# EAGLE board brain2_v10 (EAGLE 9.6.2)
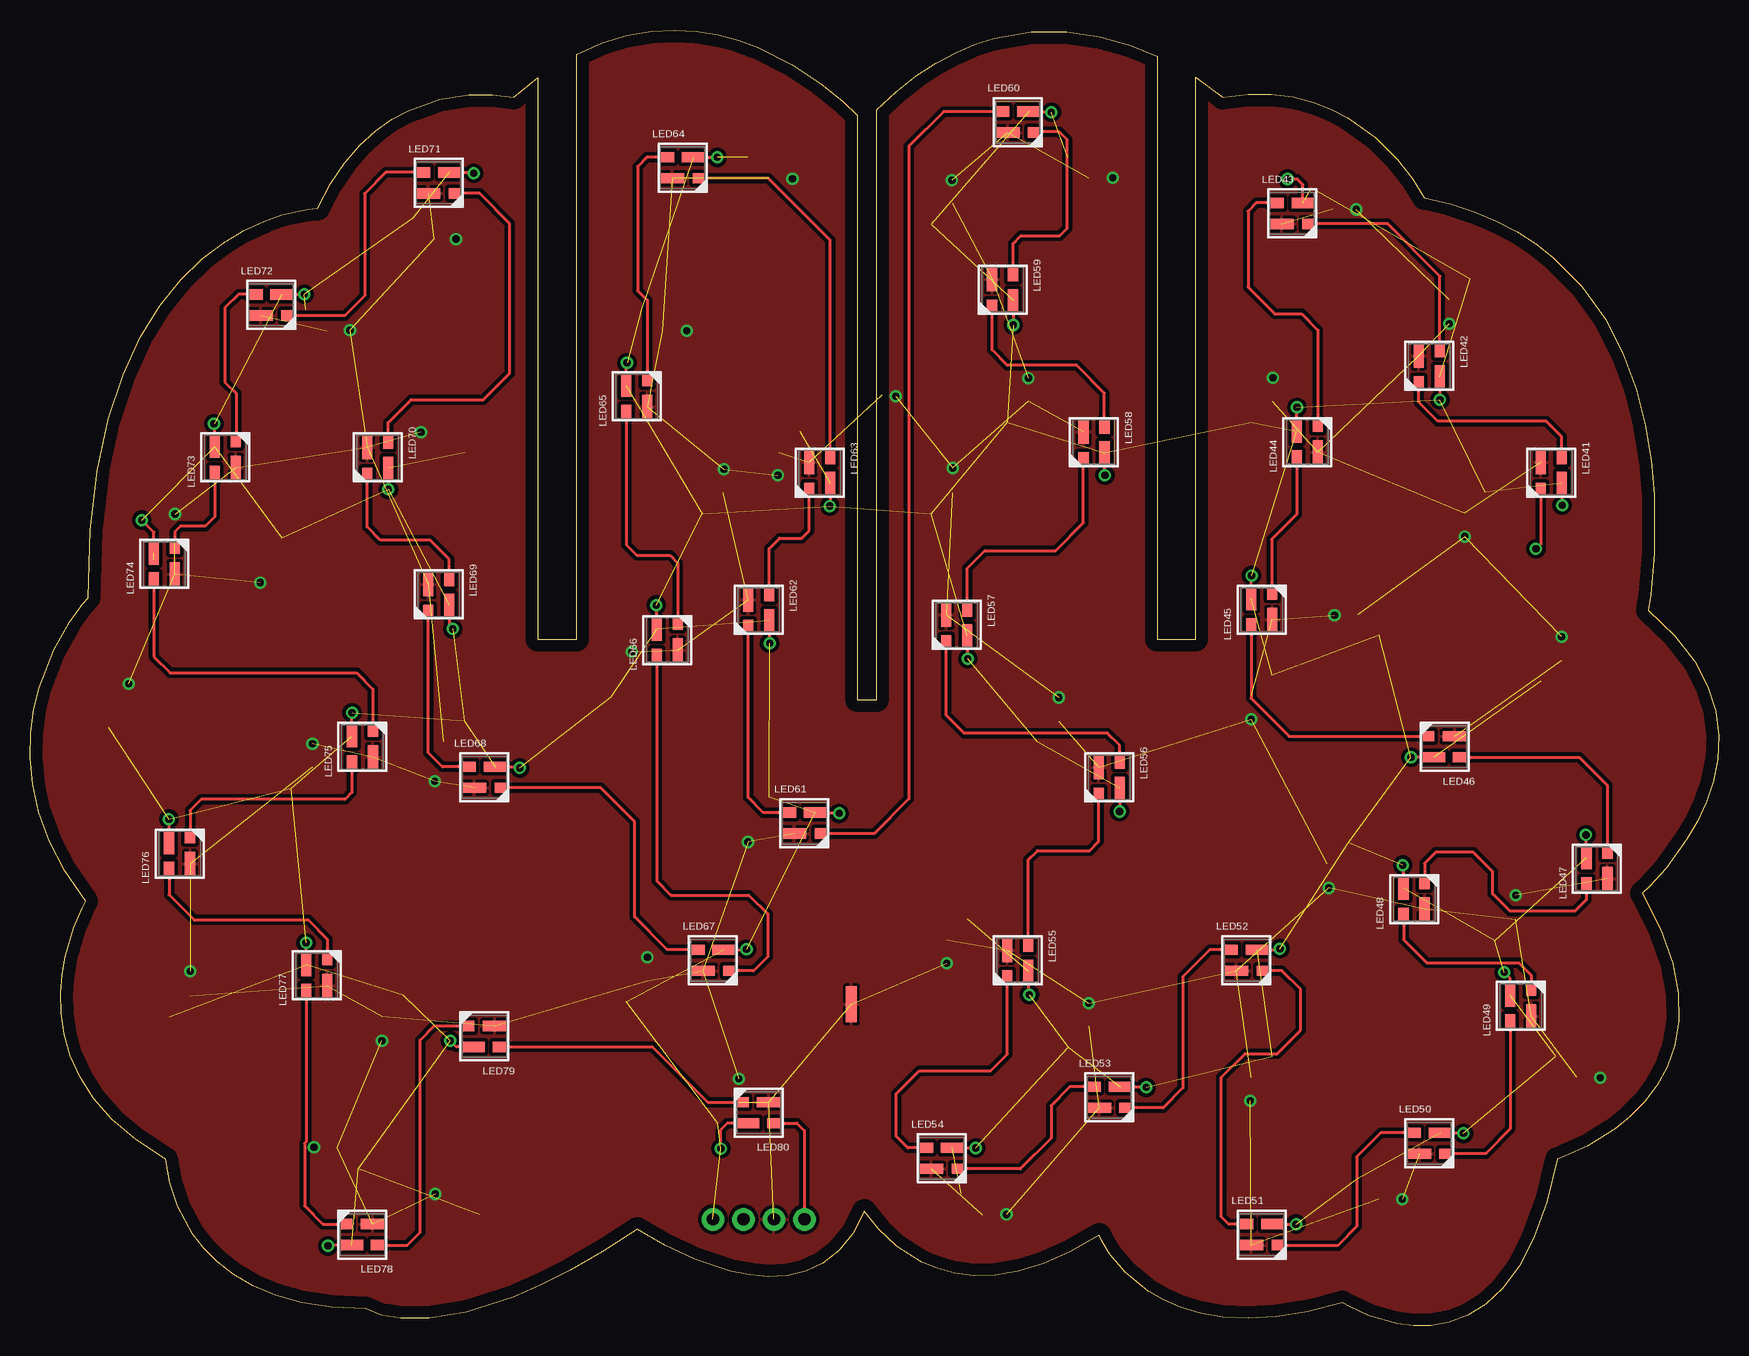
[diagram p0: board, top side]
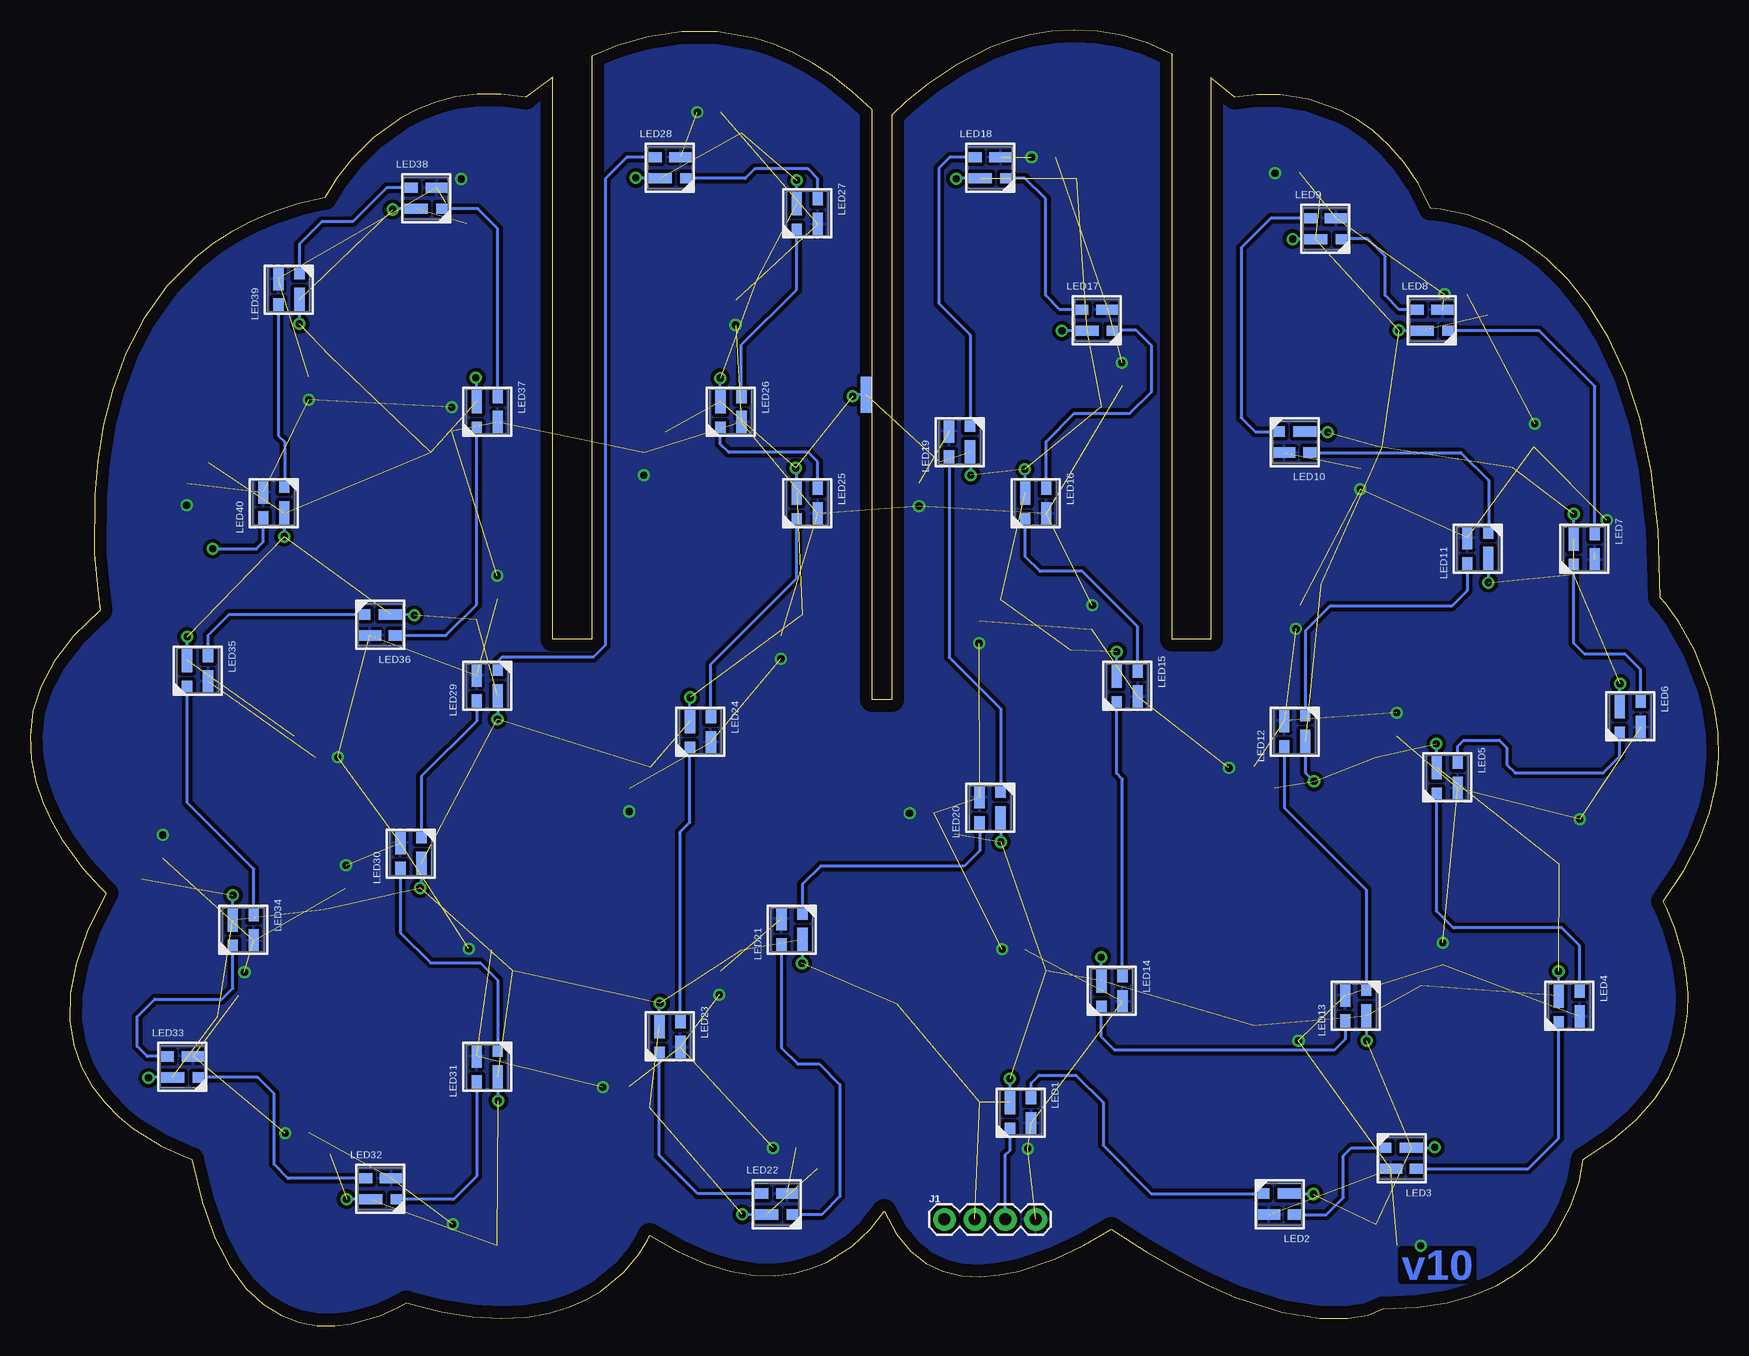
[diagram p1: board, bottom side, seen from below]

Size 140.73 x 107.98 mm. Coordinates in mm from the lower left corner, seen from the top.
Outline: 4.85,60.67 5.03,66.31 5.61,71.26 6.54,75.55 7.75,79.25 9.2,82.38 10.81,85.01 12.54,87.17 14.34,88.91 16.13,90.27 17.87,91.31 19.5,92.06 20.96,92.57 23.15,93.06 23.98,93.14 25.05,95.19 26.22,96.93 27.48,98.38 28.8,99.57 30.15,100.52 31.51,101.26 34.16,102.2 36.56,102.58 38.52,102.6 40.31,102.38 42.32,103.99 42.32,57.21 45.54,57.21 45.54,105.98 47.67,106.91 49.75,107.53 51.77,107.88 53.71,107.98 55.58,107.87 57.36,107.57 59.06,107.11 60.65,106.53 63.51,105.1 65.88,103.52 67.71,102.03 68.93,100.87 68.93,52.18 70.56,52.18 70.56,101.32 72.21,102.85 73.85,104.15 75.5,105.23 77.13,106.1 78.75,106.79 80.34,107.3 83.45,107.84 86.4,107.85 89.16,107.44 91.69,106.72 93.93,105.81 93.93,57.21 97.16,57.21 97.16,104.03 99.41,102.38 101.51,102.64 103.46,102.64 105.26,102.41 106.92,101.98 108.44,101.39 109.81,100.68 112.14,99 113.92,97.22 115.18,95.61 116.17,94 118.36,93.48 120.38,92.83 122.23,92.05 123.93,91.16 125.49,90.16 126.9,89.06 129.32,86.62 131.25,83.92 132.74,81.03 133.84,78.04 134.61,75.02 135.09,72.07 135.34,69.24 135.35,64.32 135.06,60.9 134.86,59.62 137.08,57.5 138.72,55.38 139.83,53.27 140.48,51.19 140.73,49.17 140.64,47.22 140.26,45.36 139.67,43.61 138.92,41.99 138.08,40.53 136.34,38.13 134.94,36.58 134.36,36.03 135.9,32.99 136.88,30.21 137.36,27.69 137.4,25.42 137.08,23.39 136.44,21.58 135.56,19.99 134.51,18.61 133.33,17.42 132.11,16.43 129.76,14.97 127.98,14.15 127.27,13.89 126.39,10.29 125.33,7.34 124.1,4.97 122.75,3.15 121.3,1.79 119.81,0.86 118.29,0.29 116.78,0.02 115.32,0 113.95,0.17 111.58,0.84 109.96,1.58 109.36,1.93 106.47,1.18 103.86,0.75 101.5,0.62 99.39,0.72 97.52,1.04 95.86,1.54 94.42,2.16 93.18,2.89 91.25,4.47 89.99,5.98 89.3,7.1 89.09,7.55 86.68,6.15 84.43,5.16 82.35,4.53 80.42,4.22 78.66,4.19 77.06,4.39 75.61,4.78 74.32,5.31 72.21,6.64 70.71,8.02 69.52,9.55 68.56,7.67 67.39,6.23 66.07,5.21 64.63,4.54 63.1,4.19 61.52,4.1 59.92,4.24 58.34,4.55 55.38,5.54 52.92,6.69 50.6,8.05 47.69,6.17 45.01,4.62 42.53,3.37 40.27,2.39 36.37,1.13 33.26,0.62 30.9,0.61 29.26,0.9 27.99,1.4 25.14,1.54 22.63,1.94 20.44,2.55 18.55,3.35 16.95,4.3 15.6,5.35 14.48,6.48 13.58,7.65 12.31,9.94 11.63,11.94 11.3,13.89 8.85,15.48 6.87,17.16 5.33,18.91 4.17,20.7 3.36,22.5 2.85,24.29 2.6,26.03 2.56,27.7 2.69,29.28 2.94,30.74 3.65,33.17 4.34,34.79 4.64,35.38 2.9,37.93 1.61,40.41 0.73,42.81 0.21,45.12 0,47.33 0.06,49.42 0.33,51.37 0.78,53.17 2,56.29 3.33,58.65 4.41,60.15 4.85,60.67
Copper layers (1*16): Top 0.035mm / dielectric 1.5mm / Bottom 0.035mm
Design rules "default": minimum track width 6mil, minimum drill 0.35mm, track to track 6mil, track to pad 6mil, pad to pad 6mil, via to via 6mil, smd to smd 6mil, copper to edge 40mil, drill to drill 6mil, minimum pad ring 10mil, minimum via ring 8mil, stop-mask expansion 4mil, vias tented up to drill 0mil, thermal gap 10mil
tKeepout: area 42.4,0.9 to 45.7,57.2; area 68.9,5.7 to 70.6,52.2; area 93.9,-2.2 to 97.3,57.2
bKeepout: area 94.3,-2.7 to 97.2,57.1; area 69,7.2 to 70.6,52.2; area 42.4,2.9 to 45.5,57.2

## Footprints (pad centres in the part's own frame; a part is rotated, then mirrored left to right if it is on the bottom)
1X04 = drill 1.016 pad 1.88: 1 0,0; 2 2.54,0; 3 5.08,0; 4 7.62,0
1X01_SOLDER_PADS = smd 3 x 0.9: 1 0,0
3.5X3.5_RGB_LED = smd 1.15 x 0.85: 1 -1.275,0.875 | smd 2 x 0.85: 2 -0.85,-0.875 | smd 1 x 0.85: 3 1.35,-0.875 | smd 1.9 x 0.85: 4 0.9,0.875

## Placement (x,y rotation side)
FRAME1  FRAME-LEDGER  [CREATIVE_COMMONS]  220.75,1.25 0 bottom  (outside the outline)
FRAME2  FRAME-LEDGER  [CREATIVE_COMMONS]  220.75,10.14 0 bottom  (outside the outline)
FRAME3  FRAME-LEDGER  [CREATIVE_COMMONS]  220.75,19.03 0 bottom  (outside the outline)
J1  [1X04]  64.54,8.87 0 bottom
J2  [1X01_SOLDER_PADS]  68.45,26.78 270 top
J3  [1X01_SOLDER_PADS]  71.04,77.58 90 bottom
LED1  3.5X3.5_RGB_LED3.5X3.5  [3.5X3.5_RGB_LED]  58.19,17.76 270 bottom
LED2  3.5X3.5_RGB_LED3.5X3.5  [3.5X3.5_RGB_LED]  36.6,10.14 180 bottom
LED3  3.5X3.5_RGB_LED3.5X3.5  [3.5X3.5_RGB_LED]  26.44,13.95 180 bottom
LED4  3.5X3.5_RGB_LED3.5X3.5  [3.5X3.5_RGB_LED]  12.47,26.65 270 bottom
LED5  3.5X3.5_RGB_LED3.5X3.5  [3.5X3.5_RGB_LED]  22.63,45.7 270 bottom
LED6  3.5X3.5_RGB_LED3.5X3.5  [3.5X3.5_RGB_LED]  7.39,50.78 270 bottom
LED7  3.5X3.5_RGB_LED3.5X3.5  [3.5X3.5_RGB_LED]  11.2,64.75 270 bottom
LED8  3.5X3.5_RGB_LED3.5X3.5  [3.5X3.5_RGB_LED]  23.9,83.8 0 bottom
LED9  3.5X3.5_RGB_LED3.5X3.5  [3.5X3.5_RGB_LED]  32.79,91.42 0 bottom
LED10  3.5X3.5_RGB_LED3.5X3.5  [3.5X3.5_RGB_LED]  35.33,73.64 180 bottom
LED11  3.5X3.5_RGB_LED3.5X3.5  [3.5X3.5_RGB_LED]  20.09,64.75 90 bottom
LED12  3.5X3.5_RGB_LED3.5X3.5  [3.5X3.5_RGB_LED]  35.33,49.51 90 bottom
LED13  3.5X3.5_RGB_LED3.5X3.5  [3.5X3.5_RGB_LED]  30.25,26.65 90 bottom
LED14  3.5X3.5_RGB_LED3.5X3.5  [3.5X3.5_RGB_LED]  50.57,27.92 270 bottom
LED15  3.5X3.5_RGB_LED3.5X3.5  [3.5X3.5_RGB_LED]  49.3,53.32 270 bottom
LED16  3.5X3.5_RGB_LED3.5X3.5  [3.5X3.5_RGB_LED]  56.92,68.56 270 bottom
LED17  3.5X3.5_RGB_LED3.5X3.5  [3.5X3.5_RGB_LED]  51.84,83.8 0 bottom
LED18  3.5X3.5_RGB_LED3.5X3.5  [3.5X3.5_RGB_LED]  60.73,96.5 0 bottom
LED19  3.5X3.5_RGB_LED3.5X3.5  [3.5X3.5_RGB_LED]  63.27,73.64 90 bottom
LED20  3.5X3.5_RGB_LED3.5X3.5  [3.5X3.5_RGB_LED]  60.73,43.16 90 bottom
LED21  3.5X3.5_RGB_LED3.5X3.5  [3.5X3.5_RGB_LED]  77.24,33 90 bottom
LED22  3.5X3.5_RGB_LED3.5X3.5  [3.5X3.5_RGB_LED]  78.51,10.14 0 bottom
LED23  3.5X3.5_RGB_LED3.5X3.5  [3.5X3.5_RGB_LED]  87.4,24.11 270 bottom
LED24  3.5X3.5_RGB_LED3.5X3.5  [3.5X3.5_RGB_LED]  84.86,49.51 270 bottom
LED25  3.5X3.5_RGB_LED3.5X3.5  [3.5X3.5_RGB_LED]  75.97,68.56 270 bottom
LED26  3.5X3.5_RGB_LED3.5X3.5  [3.5X3.5_RGB_LED]  82.32,76.18 270 bottom
LED27  3.5X3.5_RGB_LED3.5X3.5  [3.5X3.5_RGB_LED]  75.97,92.69 270 bottom
LED28  3.5X3.5_RGB_LED3.5X3.5  [3.5X3.5_RGB_LED]  87.4,96.5 0 bottom
LED29  3.5X3.5_RGB_LED3.5X3.5  [3.5X3.5_RGB_LED]  102.64,53.32 90 bottom
LED30  3.5X3.5_RGB_LED3.5X3.5  [3.5X3.5_RGB_LED]  108.99,39.35 90 bottom
LED31  3.5X3.5_RGB_LED3.5X3.5  [3.5X3.5_RGB_LED]  102.64,21.57 90 bottom
LED32  3.5X3.5_RGB_LED3.5X3.5  [3.5X3.5_RGB_LED]  111.53,11.41 0 bottom
LED33  3.5X3.5_RGB_LED3.5X3.5  [3.5X3.5_RGB_LED]  128.04,21.57 0 bottom
LED34  3.5X3.5_RGB_LED3.5X3.5  [3.5X3.5_RGB_LED]  122.96,33 270 bottom
LED35  3.5X3.5_RGB_LED3.5X3.5  [3.5X3.5_RGB_LED]  126.77,54.59 270 bottom
LED36  3.5X3.5_RGB_LED3.5X3.5  [3.5X3.5_RGB_LED]  111.53,58.4 180 bottom
LED37  3.5X3.5_RGB_LED3.5X3.5  [3.5X3.5_RGB_LED]  102.64,76.18 270 bottom
LED38  3.5X3.5_RGB_LED3.5X3.5  [3.5X3.5_RGB_LED]  107.72,93.96 0 bottom
LED39  3.5X3.5_RGB_LED3.5X3.5  [3.5X3.5_RGB_LED]  119.15,86.34 90 bottom
LED40  3.5X3.5_RGB_LED3.5X3.5  [3.5X3.5_RGB_LED]  120.42,68.56 90 bottom
LED41  3.5X3.5_RGB_LED3.5X3.5  [3.5X3.5_RGB_LED]  126.77,71.1 270 top
LED42  3.5X3.5_RGB_LED3.5X3.5  [3.5X3.5_RGB_LED]  116.61,79.99 270 top
LED43  3.5X3.5_RGB_LED3.5X3.5  [3.5X3.5_RGB_LED]  105.18,92.69 0 top
LED44  3.5X3.5_RGB_LED3.5X3.5  [3.5X3.5_RGB_LED]  106.45,73.64 90 top
LED45  3.5X3.5_RGB_LED3.5X3.5  [3.5X3.5_RGB_LED]  102.64,59.67 90 top
LED46  3.5X3.5_RGB_LED3.5X3.5  [3.5X3.5_RGB_LED]  117.88,48.24 180 top
LED47  3.5X3.5_RGB_LED3.5X3.5  [3.5X3.5_RGB_LED]  130.58,38.08 90 top
LED48  3.5X3.5_RGB_LED3.5X3.5  [3.5X3.5_RGB_LED]  115.34,35.54 90 top
LED49  3.5X3.5_RGB_LED3.5X3.5  [3.5X3.5_RGB_LED]  124.23,26.65 90 top
LED50  3.5X3.5_RGB_LED3.5X3.5  [3.5X3.5_RGB_LED]  116.61,15.22 0 top
LED51  3.5X3.5_RGB_LED3.5X3.5  [3.5X3.5_RGB_LED]  102.64,7.6 0 top
LED52  3.5X3.5_RGB_LED3.5X3.5  [3.5X3.5_RGB_LED]  101.37,30.46 0 top
LED53  3.5X3.5_RGB_LED3.5X3.5  [3.5X3.5_RGB_LED]  89.94,19.03 0 top
LED54  3.5X3.5_RGB_LED3.5X3.5  [3.5X3.5_RGB_LED]  75.97,13.95 0 top
LED55  3.5X3.5_RGB_LED3.5X3.5  [3.5X3.5_RGB_LED]  82.32,30.46 270 top
LED56  3.5X3.5_RGB_LED3.5X3.5  [3.5X3.5_RGB_LED]  89.94,45.7 270 top
LED57  3.5X3.5_RGB_LED3.5X3.5  [3.5X3.5_RGB_LED]  77.24,58.4 270 top
LED58  3.5X3.5_RGB_LED3.5X3.5  [3.5X3.5_RGB_LED]  88.67,73.64 270 top
LED59  3.5X3.5_RGB_LED3.5X3.5  [3.5X3.5_RGB_LED]  81.05,86.34 270 top
LED60  3.5X3.5_RGB_LED3.5X3.5  [3.5X3.5_RGB_LED]  82.32,100.31 0 top
LED61  3.5X3.5_RGB_LED3.5X3.5  [3.5X3.5_RGB_LED]  64.54,41.89 0 top
LED62  3.5X3.5_RGB_LED3.5X3.5  [3.5X3.5_RGB_LED]  60.73,59.67 270 top
LED63  3.5X3.5_RGB_LED3.5X3.5  [3.5X3.5_RGB_LED]  65.81,71.1 270 top
LED64  3.5X3.5_RGB_LED3.5X3.5  [3.5X3.5_RGB_LED]  54.38,96.5 0 top
LED65  3.5X3.5_RGB_LED3.5X3.5  [3.5X3.5_RGB_LED]  50.57,77.45 90 top
LED66  3.5X3.5_RGB_LED3.5X3.5  [3.5X3.5_RGB_LED]  53.11,57.13 90 top
LED67  3.5X3.5_RGB_LED3.5X3.5  [3.5X3.5_RGB_LED]  56.92,30.46 0 top
LED68  3.5X3.5_RGB_LED3.5X3.5  [3.5X3.5_RGB_LED]  37.87,45.7 0 top
LED69  3.5X3.5_RGB_LED3.5X3.5  [3.5X3.5_RGB_LED]  34.06,60.94 270 top
LED70  3.5X3.5_RGB_LED3.5X3.5  [3.5X3.5_RGB_LED]  28.98,72.37 270 top
LED71  3.5X3.5_RGB_LED3.5X3.5  [3.5X3.5_RGB_LED]  34.06,95.23 0 top
LED72  3.5X3.5_RGB_LED3.5X3.5  [3.5X3.5_RGB_LED]  20.09,85.07 0 top
LED73  3.5X3.5_RGB_LED3.5X3.5  [3.5X3.5_RGB_LED]  16.28,72.37 90 top
LED74  3.5X3.5_RGB_LED3.5X3.5  [3.5X3.5_RGB_LED]  11.2,63.48 90 top
LED75  3.5X3.5_RGB_LED3.5X3.5  [3.5X3.5_RGB_LED]  27.71,48.24 90 top
LED76  3.5X3.5_RGB_LED3.5X3.5  [3.5X3.5_RGB_LED]  12.47,39.35 90 top
LED77  3.5X3.5_RGB_LED3.5X3.5  [3.5X3.5_RGB_LED]  23.9,29.19 90 top
LED78  3.5X3.5_RGB_LED3.5X3.5  [3.5X3.5_RGB_LED]  27.71,7.6 180 top
LED79  3.5X3.5_RGB_LED3.5X3.5  [3.5X3.5_RGB_LED]  37.87,24.11 180 top
LED80  3.5X3.5_RGB_LED3.5X3.5  [3.5X3.5_RGB_LED]  60.73,17.76 180 top

## Library data of the parts
FRAME1-FRAME3 = SparkFun-Aesthetics
J1 = SparkFun-Connectors; PROD_ID: CONN-09696
J2 J3 = SparkFun-Connectors
LED1-LED80 = brain

## Nets
5V: J1.4 LED1.4 LED2.4 LED3.4 LED4.4 LED5.4 LED6.4 LED7.4 LED8.4 LED9.4 LED10.4 LED11.4 LED12.4 LED13.4 LED14.4 LED15.4 LED16.4 LED17.4 LED18.4 LED19.4 LED20.4 LED21.4 LED22.4 LED23.4 LED24.4 LED25.4 LED26.4 LED27.4 LED28.4 LED29.4 LED30.4 LED31.4 LED32.4 LED33.4 LED34.4 LED35.4 LED36.4 LED37.4 LED38.4 LED39.4 LED40.4 LED41.4 LED42.4 LED43.4 LED44.4 LED45.4 LED46.4 LED47.4 LED48.4 LED49.4 LED50.4 LED51.4 LED52.4 LED53.4 LED54.4 LED55.4 LED56.4 LED57.4 LED58.4 LED59.4 LED60.4 LED61.4 LED62.4 LED63.4 LED64.4 LED65.4 LED66.4 LED67.4 LED68.4 LED69.4 LED70.4 LED71.4 LED72.4 LED73.4 LED74.4 LED75.4 LED76.4 LED77.4 LED78.4 LED79.4 LED80.4
DI: J1.3 LED1.3
DO: J1.1 LED80.1
DO_1: LED40.1 LED41.3
GND: J1.2 J2.1 J3.1 LED1.2 LED2.2 LED3.2 LED4.2 LED5.2 LED6.2 LED7.2 LED8.2 LED9.2 LED10.2 LED11.2 LED12.2 LED13.2 LED14.2 LED15.2 LED16.2 LED17.2 LED18.2 LED19.2 LED20.2 LED21.2 LED22.2 LED23.2 LED24.2 LED25.2 LED26.2 LED27.2 LED28.2 LED29.2 LED30.2 LED31.2 LED32.2 LED33.2 LED34.2 LED35.2 LED36.2 LED37.2 LED38.2 LED39.2 LED40.2 LED41.2 LED42.2 LED43.2 LED44.2 LED45.2 LED46.2 LED47.2 LED48.2 LED49.2 LED50.2 LED51.2 LED52.2 LED53.2 LED54.2 LED55.2 LED56.2 LED57.2 LED58.2 LED59.2 LED60.2 LED61.2 LED62.2 LED63.2 LED64.2 LED65.2 LED66.2 LED67.2 LED68.2 LED69.2 LED70.2 LED71.2 LED72.2 LED73.2 LED74.2 LED75.2 LED76.2 LED77.2 LED78.2 LED79.2 LED80.2
N$1: LED1.1 LED2.3
N$2: LED2.1 LED3.3
N$3: LED3.1 LED4.3
N$4: LED4.1 LED5.3
N$5: LED6.1 LED7.3
N$6: LED7.1 LED8.3
N$7: LED8.1 LED9.3
N$8: LED9.1 LED10.3
N$9: LED11.1 LED12.3
N$10: LED5.1 LED6.3
N$11: LED12.1 LED13.3
N$12: LED13.1 LED14.3
N$13: LED14.1 LED15.3
N$14: LED16.1 LED17.3
N$15: LED17.1 LED18.3
N$16: LED18.1 LED19.3
N$17: LED19.1 LED20.3
N$18: LED15.1 LED16.3
N$19: LED21.1 LED22.3
N$20: LED22.1 LED23.3
N$21: LED23.1 LED24.3
N$22: LED24.1 LED25.3
N$23: LED26.1 LED27.3
N$24: LED27.1 LED28.3
N$25: LED28.1 LED29.3
N$26: LED29.1 LED30.3
N$27: LED25.1 LED26.3
N$28: LED31.1 LED32.3
N$29: LED32.1 LED33.3
N$30: LED33.1 LED34.3
N$31: LED34.1 LED35.3
N$32: LED36.1 LED37.3
N$33: LED37.1 LED38.3
N$34: LED38.1 LED39.3
N$35: LED39.1 LED40.3
N$36: LED35.1 LED36.3
N$37: LED10.1 LED11.3
N$38: LED20.1 LED21.3
N$39: LED30.1 LED31.3
N$40: LED41.1 LED42.3
N$41: LED42.1 LED43.3
N$42: LED43.1 LED44.3
N$43: LED44.1 LED45.3
N$44: LED46.1 LED47.3
N$45: LED47.1 LED48.3
N$46: LED48.1 LED49.3
N$47: LED49.1 LED50.3
N$48: LED45.1 LED46.3
N$49: LED51.1 LED52.3
N$50: LED52.1 LED53.3
N$51: LED53.1 LED54.3
N$52: LED54.1 LED55.3
N$53: LED56.1 LED57.3
N$54: LED57.1 LED58.3
N$55: LED58.1 LED59.3
N$56: LED59.1 LED60.3
N$57: LED55.1 LED56.3
N$58: LED61.1 LED62.3
N$59: LED62.1 LED63.3
N$60: LED63.1 LED64.3
N$61: LED64.1 LED65.3
N$62: LED66.1 LED67.3
N$63: LED67.1 LED68.3
N$64: LED68.1 LED69.3
N$65: LED69.1 LED70.3
N$66: LED65.1 LED66.3
N$67: LED71.1 LED72.3
N$68: LED72.1 LED73.3
N$69: LED73.1 LED74.3
N$70: LED74.1 LED75.3
N$71: LED76.1 LED77.3
N$72: LED77.1 LED78.3
N$73: LED78.1 LED79.3
N$74: LED79.1 LED80.3
N$75: LED75.1 LED76.3
N$76: LED50.1 LED51.3
N$77: LED60.1 LED61.3
N$78: LED70.1 LED71.3

## Tracks (layer width: path | path; a pad name or v marks a point on that pad's centre or on a via)
5V  (via drill 0.6)  (80 unrouted)
  Top 0.254: LED41.4 127.64,68.42 v127.68,68.38 | LED42.4 117.48,77.19 v117.49,77.17 | LED43.4 106.08,95.09 105.61,95.56 v104.79,95.56 | LED44.4 105.57,76.53 v105.58,76.54 | LED45.4 101.76,62.48 v101.8,62.52 | LED46.4 115.09,47.37 v115.08,47.38 | LED47.4 129.7,40.86 v129.66,40.9 | LED48.4 114.46,38.32 v114.4,38.39 | LED49.4 123.35,28.95 v122.85,29.45 | LED50.4 119.39,16.1 v119.45,16.04 | LED51.4 105.49,8.48 v105.51,8.47 | LED52.4 104.07,31.34 v104.16,31.43 | LED53.4 92.97,19.91 v93.01,19.87 | LED54.4 78.8,14.83 v78.81,14.82 | LED55.4 83.19,27.68 v83.28,27.59 | LED56.4 90.81,42.87 v90.8,42.86 | LED57.4 78.11,55.62 v78.15,55.58 | LED58.4 89.54,70.91 v89.58,70.87 | LED59.4 81.92,83.41 v81.93,83.4 | LED60.4 85.05,101.19 v85.11,101.13 | LED61.4 67.37,42.77 v67.43,42.71 | LED62.4 61.6,56.92 v61.64,56.88 | LED63.4 66.68,68.35 v66.64,68.31 | LED64.4 57.26,97.38 v57.27,97.37 | LED65.4 49.69,80.18 v49.75,80.25 | LED66.4 52.23,60.01 v52.19,60.05 | LED67.4 59.67,31.34 v59.71,31.38 | LED68.4 40.72,46.58 v40.81,46.49 | LED69.4 34.93,58.37 v35.23,58.07 | LED70.4 29.85,69.72 v29.86,69.71 | LED71.4 36.91,96.11 v36.98,96.05 | LED72.4 22.84,85.95 v22.85,85.96 | LED73.4 15.4,75.1 v15.34,75.17 | LED74.4 10.32,66.14 v9.32,67.14 | LED75.4 26.83,51.08 v26.84,51.09 | LED76.4 11.59,42.21 v11.58,42.22 | LED77.4 23.02,31.9 v23.01,31.91 | LED78.4 24.9,6.73 v24.84,6.66 | LED79.4 35.54,23.24 v35.02,23.76 | LED80.4 58.12,16.89 57.58,16.34 v57.58,14.77
  pour Bottom (isolate 0.305): 140.74,-0.02 140.74,107.93 -0.23,107.93 -0.23,-0.02
DI
  Bottom 0.254: J1.3 59.46,14.23 59.06,14.63 LED1.3
DO
  Top 0.254: LED80.1 63.91,16.89 64.54,16.26 J1.1
DO_1  (via drill 0.6)
  Top 0.254: LED41.3 125.89,65.15 v125.5,64.75
  Bottom 0.254: v125.5,64.75 121.86,64.75 121.29,65.33 LED40.1
GND  (via drill 0.6)  (82 unrouted)
  Bottom 0.254: LED1.2 59.06,20.57 v59.07,20.58 | LED2.2 33.81,11.02 v33.78,10.98 | LED3.2 23.71,14.83 v23.67,14.87 | LED4.2 13.34,29.53 v13.35,29.55 | LED5.2 23.5,48.46 v23.54,48.5 | LED6.2 8.26,53.46 v8.22,53.5 | LED7.2 12.07,67.63 v12.08,67.65 | LED8.2 26.63,82.93 v26.66,82.96 | LED9.2 35.49,90.55 v35.5,90.56 | LED10.2 32.64,74.52 v32.58,74.46 | LED11.2 19.21,61.95 v19.2,61.93 | LED13.2 29.37,23.8 v29.33,23.76 | LED14.2 51.44,30.7 v51.45,30.72 | LED15.2 50.17,56.16 v50.16,56.17 | LED16.2 57.79,71.34 v57.83,71.38 | LED17.2 54.72,82.93 v54.73,82.91 | LED18.2 63.51,95.63 v63.54,95.59 | LED19.2 62.33,72.73 v62.33,70.87 | LED20.2 59.85,40.33 v59.84,40.32 | LED21.2 76.36,30.25 v76.4,30.21 | LED22.2 81.36,9.27 v81.38,9.28 | LED23.2 88.27,26.84 v88.23,26.88 | LED24.2 85.73,52.35 v85.72,52.36 | LED25.2 76.84,71.42 v76.91,71.48 | LED26.2 83.19,78.96 v83.2,78.98 | LED27.2 76.84,95.45 v76.83,95.46 | LED28.2 90.2,95.63 v90.24,95.66 | LED29.2 101.76,50.57 v101.77,50.55 | LED30.2 108.11,36.6 v108.22,36.48 | LED31.2 101.76,18.82 v101.7,18.75 | LED32.2 114.33,10.54 v114.34,10.55 | LED33.2 130.82,20.7 v130.85,20.66 | LED34.2 123.83,35.86 v123.82,35.87 | LED35.2 127.64,57.4 v127.63,57.41 | LED36.2 108.77,59.28 v108.71,59.22 | LED37.2 103.51,78.94 v103.58,79 | LED38.2 110.44,93.09 v110.51,93.02 | LED39.2 118.27,83.51 v118.28,83.5 | LED40.2 119.54,65.78 v119.55,65.77 | J3.1 72.03,77.58 v72.16,77.45 | LED12.2 34.45,46.1 v33.73,45.37
  pour Top (isolate 0.305): 140.74,-0.02 140.74,107.93 -0.23,107.93 -0.23,-0.02
N$1
  Bottom 0.254: LED1.1 57.31,20.21 56.64,20.89 53.56,20.89 51.3,18.63 51.3,15.04 47.27,11.02 LED2.3
N$2
  Bottom 0.254: LED2.1 32.7,9.27 31.29,10.68 31.29,14.16 30.62,14.83 LED3.3
N$3
  Bottom 0.254: LED3.1 15.88,13.08 13.34,15.62 LED4.3
N$4
  Bottom 0.254: LED4.1 11.59,31.67 13.08,33.15 22.12,33.15 23.5,34.54 LED5.3
N$5
  Bottom 0.254: LED6.1 6.51,54.68 7.79,55.96 11.17,55.96 12.07,56.86 LED7.3
N$6
  Bottom 0.254: LED7.1 10.32,78.28 14.97,82.93 LED8.3
N$7
  Bottom 0.254: LED9.3 31.4,90.58 29.25,90.58 27.81,89.14 27.81,85.86 26.62,84.68 LED8.1
N$8
  Bottom 0.254: LED9.1 37.32,92.3 39.8,89.82 39.8,75.67 38.63,74.51 36.69,74.51 LED10.3
N$9
  Bottom 0.254: LED11.1 20.96,61.26 22.24,59.98 32.4,59.98 34.45,57.93 LED12.3
N$10
  Bottom 0.254: LED5.1 21.75,48.28 21.23,48.8 18.28,48.8 17.65,48.17 17.65,46.77 16.96,46.08 9.62,46.08 8.26,47.44 LED6.3
N$11
  Bottom 0.254: LED12.1 36.2,43.15 29.37,36.32 LED13.3
N$12
  Bottom 0.254: LED13.1 31.12,23.9 32.05,22.97 50.34,22.97 51.44,24.07 LED14.3
N$13
  Bottom 0.254: LED14.1 49.69,45.56 50.17,46.04 LED15.3
N$14
  Bottom 0.254: LED16.1 56.04,73.68 53.69,76.03 49.07,76.03 47.26,77.83 47.26,81.67 48.56,82.96 50.45,82.96 LED17.3
N$15
  Bottom 0.254: LED17.1 54.92,84.68 56.1,85.86 56.1,93.91 57.82,95.63 LED18.3
N$16
  Bottom 0.254: LED18.1 64.07,97.38 64.99,96.45 64.99,85.2 62.38,82.58 62.38,75.01 LED19.3
N$17
  Bottom 0.254: LED19.1 64.14,55.7 59.85,51.41 LED20.3
N$18
  Bottom 0.254: LED15.1 48.42,58.26 53.03,62.87 56.56,62.87 57.79,64.1 LED16.3
N$19
  Bottom 0.254: LED21.1 78.11,23.18 76.75,21.83 74.97,21.83 73.25,20.1 73.25,10.78 74.76,9.27 LED22.3
N$20
  Bottom 0.254: LED22.1 85.07,11.02 88.27,14.22 LED23.3
N$21
  Bottom 0.254: LED23.1 86.52,41.17 85.73,41.96 LED24.3
N$22
  Bottom 0.254: LED24.1 83.98,55.14 76.84,62.28 LED25.3
N$23
  Bottom 0.254: LED26.1 81.44,81.76 76.84,86.36 LED27.3
N$24
  Bottom 0.254: LED27.1 75.09,95.6 75.89,96.4 80.33,96.4 81.11,95.63 LED28.3
N$25
  Bottom 0.254: LED28.1 90.99,97.38 92.77,95.59 92.77,56.73 93.78,55.72 101.4,55.72 101.76,55.36 LED29.3
N$26
  Bottom 0.254: LED29.1 103.51,50.39 108.11,45.79 LED30.3
N$27
  Bottom 0.254: LED25.1 75.09,72.01 75.86,72.78 82.52,72.78 83.19,73.45 LED26.3
N$28
  Bottom 0.254: LED31.1 103.51,12.44 105.42,10.54 LED32.3
N$29
  Bottom 0.254: LED32.1 119.23,12.29 120.39,13.44 120.39,19.34 121.75,20.7 LED33.3
N$30
  Bottom 0.254: LED33.1 130.97,22.45 131.79,23.27 131.79,25.76 130.35,27.21 124.73,27.21 123.83,28.11 LED34.3
N$31
  Bottom 0.254: LED34.1 122.08,38.05 127.64,43.61 LED35.3
N$32
  Bottom 0.254: LED36.1 106.08,57.53 103.51,60.09 LED37.3
N$33
  Bottom 0.254: LED37.1 101.76,91.44 103.41,93.09 LED38.3
N$34
  Bottom 0.254: LED38.1 110.98,94.84 113.81,92.01 116.4,92.01 118.27,90.14 LED39.3
N$35
  Bottom 0.254: LED39.1 120.02,74.19 119.5,73.67 119.5,69.95 LED40.3
N$36
  Bottom 0.254: LED35.1 125.89,57.52 124.12,59.29 112.89,59.29 LED36.3
N$37
  Bottom 0.254: LED10.1 21.5,72.77 19.17,70.44 19.17,66.14 LED11.3
N$38
  Bottom 0.254: LED20.1 61.6,39.6 62.88,38.31 74.85,38.31 76.36,36.8 LED21.3
N$39
  Bottom 0.254: LED30.1 109.86,32.76 107.33,30.23 103.19,30.23 101.76,28.8 LED31.3
N$40
  Top 0.254: LED41.1 127.64,74.09 126.33,75.4 117.32,75.4 115.73,76.98 LED42.3
N$41
  Top 0.254: LED42.1 117.48,87.47 113.14,91.82 LED43.3
N$42
  Top 0.254: LED43.1 102.19,93.57 101.52,92.9 101.52,86.55 103.73,84.34 105.96,84.34 107.32,82.98 LED44.3
N$43
  Top 0.254: LED44.1 105.57,67.64 103.47,65.54 103.47,61.06 LED45.3
N$44
  Top 0.254: LED46.1 129.11,47.37 131.45,45.03 LED47.3
N$45
  Top 0.254: LED47.1 129.7,35.51 128.75,34.55 123.34,34.55 121.89,36 121.89,37.85 120.29,39.45 117.14,39.45 116.21,38.53 LED48.3
N$46
  Top 0.254: LED48.1 114.46,32.18 116.4,30.23 124.07,30.23 125.1,29.21 LED49.3
N$47
  Top 0.254: LED49.1 123.35,16.4 121.29,14.35 LED50.3
N$48
  Top 0.254: LED45.1 101.76,52.29 104.94,49.12 LED46.3
N$49
  Top 0.254: LED51.1 99.88,8.48 99.28,9.08 99.28,20.71 101.26,22.69 103.93,22.69 105.89,24.65 105.89,28.02 104.32,29.59 LED52.3
N$50
  Top 0.254: LED52.1 98.33,31.34 96.08,29.09 96.08,19.82 94.42,18.16 LED53.3
N$51
  Top 0.254: LED53.1 86.64,19.91 85.08,18.35 85.08,15.63 82.53,13.08 LED54.3
N$52
  Top 0.254: LED54.1 73.16,14.83 72.21,15.78 72.21,19.34 74.11,21.24 80.05,21.24 81.44,22.63 LED55.3
N$53
  Top 0.254: LED56.1 90.81,48.36 89.78,49.39 77.85,49.39 76.36,50.87 LED57.3
N$54
  Top 0.254: LED57.1 78.11,63.14 79.57,64.6 85.47,64.6 87.79,66.93 LED58.3
N$55
  Top 0.254: LED58.1 89.54,77.72 87.22,80.04 81.45,80.04 80.17,81.32 LED59.3
N$56
  Top 0.254: LED59.1 81.92,90.19 82.57,90.84 85.82,90.84 86.43,91.45 86.43,98.84 85.77,99.5 83.73,99.5 LED60.3
N$57
  Top 0.254: LED55.1 83.19,38.83 83.97,39.61 88.31,39.61 89.06,40.36 LED56.3
N$58
  Top 0.254: LED61.1 61.12,42.77 59.85,44.04 LED62.3
N$59
  Top 0.254: LED62.1 61.6,64.76 62.48,65.64 64.31,65.64 64.93,66.27 LED63.3
N$60
  Top 0.254: LED63.1 66.68,90.47 61.52,95.63 LED64.3
N$61
  Top 0.254: LED64.1 51.42,97.38 50.64,96.6 50.64,86.27 51.44,85.47 LED65.3
N$62
  Top 0.254: LED66.1 52.23,37.08 53.41,35.9 59.89,35.9 61.46,34.32 61.46,30.74 60.29,29.57 58.28,29.57 LED67.3
N$63
  Top 0.254: LED67.1 53.12,31.34 50.39,34.07 50.39,42.02 47.58,44.83 LED68.3
N$64
  Top 0.254: LED68.1 34.37,46.58 33.18,47.77 LED69.3
N$65
  Top 0.254: LED69.1 34.93,63.88 33.34,65.46 29.2,65.46 28.1,66.57 LED70.3
N$66
  Top 0.254: LED65.1 49.69,65.07 50.57,64.19 53.33,64.19 53.98,63.55 LED66.3
N$67
  Top 0.254: LED71.1 29.65,96.11 27.88,94.34 27.88,85.83 26.23,84.18 21.45,84.18 LED72.3
N$68
  Top 0.254: LED72.1 17.38,85.95 16.25,84.82 16.25,78.65 17.19,77.71 17.19,73.76 LED73.3
N$69
  Top 0.254: LED73.1 15.4,67.43 14.6,66.63 12.54,66.63 12.07,66.16 LED74.3
N$70
  Top 0.254: LED74.1 10.32,55.77 11.68,54.41 27.22,54.41 28.58,53.06 LED75.3
N$71
  Top 0.254: LED76.1 11.59,35.91 13.68,33.82 23.18,33.82 24.77,32.23 LED77.3
N$72
  Top 0.254: LED77.1 23.02,15.33 22.88,15.19 22.88,9.99 24.4,8.47 26.34,8.47 LED78.3
N$73
  Top 0.254: LED78.1 31.45,6.73 32.51,7.78 32.51,23.81 33.69,24.99 LED79.3
N$74
  Top 0.254: LED79.1 51.87,23.24 56.47,18.64 LED80.3
N$75
  Top 0.254: LED75.1 26.83,44.45 26.26,43.87 14.27,43.87 13.34,42.95 LED76.3
N$76
  Top 0.254: LED50.1 112.58,16.1 110.56,14.08 110.56,8.29 108.96,6.69 104.02,6.69 LED51.3
N$77
  Top 0.254: LED60.1 76.13,101.19 73.25,98.31 73.25,43.9 70.37,41.02 LED61.3
N$78
  Top 0.254: LED70.1 29.85,75.25 31.77,77.17 37.79,77.17 39.97,79.36 39.97,91.85 37.47,94.36 LED71.3

## Text on the board
Bottom: v10